# EAGLE board I2CbusTesterV1.0 (EAGLE 5.06)
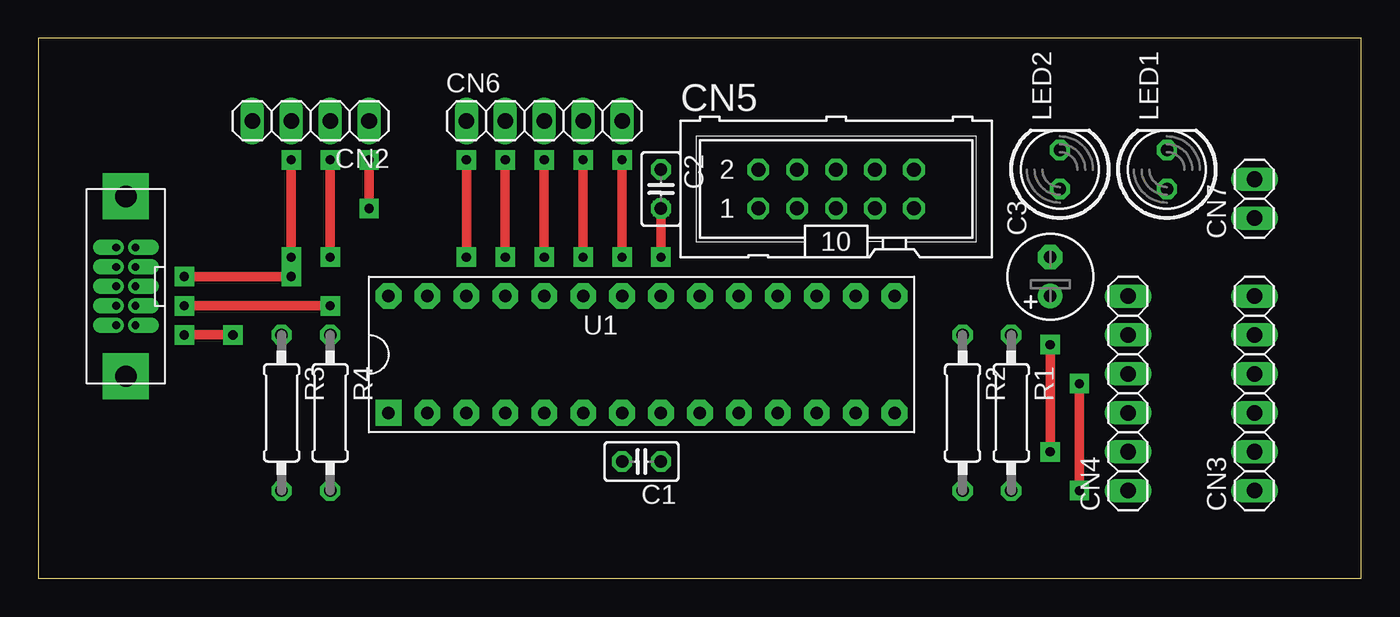
[diagram p0: board, top side]
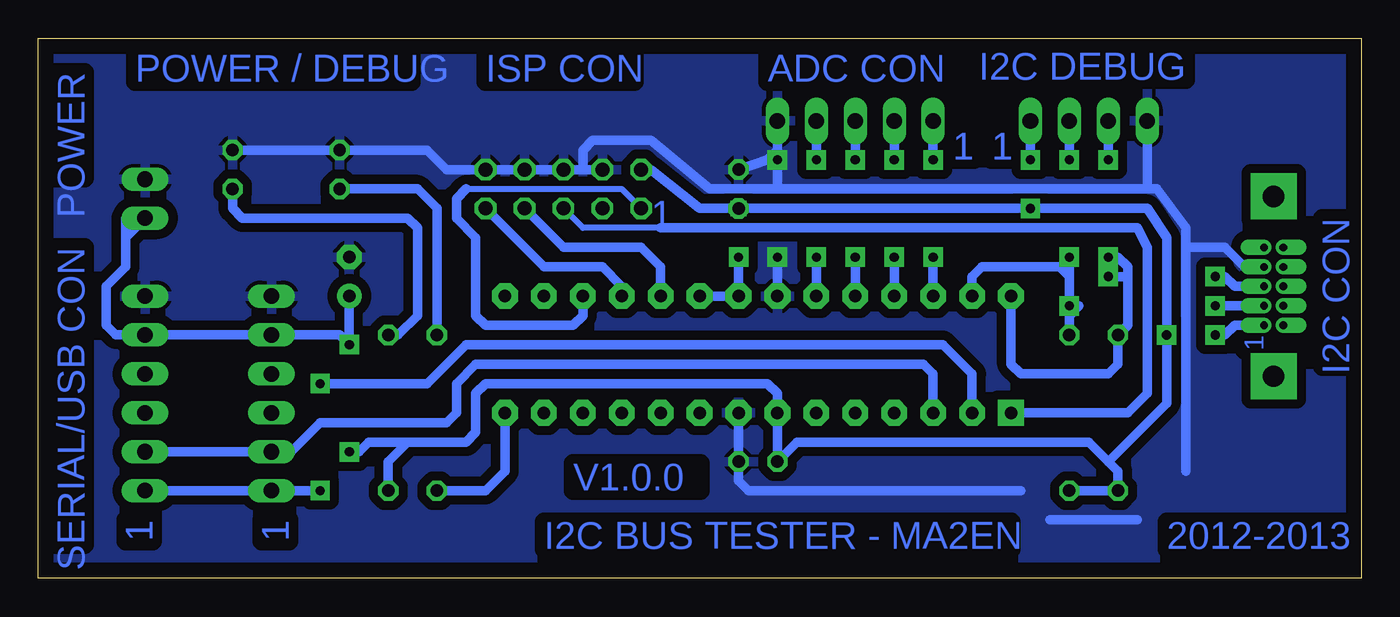
[diagram p1: board, bottom side, seen from below]

Size 86.34 x 35.23 mm. Coordinates in mm from the lower left corner, seen from the top.
Outline: 0,0 86.34,0 86.34,35.23 0,35.23 0,0
Copper layers (1*16): Top 0.035mm / dielectric 1.5mm / Bottom 0.035mm
Design rules "default": minimum track width 10mil, minimum drill 24mil, track to track 8mil, track to pad 8mil, pad to pad 8mil, via to via 8mil, smd to smd 8mil, copper to edge 40mil, drill to drill 8mil, minimum pad ring 10mil, minimum via ring 8mil, stop-mask expansion 4mil, vias tented up to drill 0mil, thermal gap 10mil

## Footprints (pad centres in the part's own frame; a part is rotated, then mirrored left to right if it is on the bottom)
C025-025X050 = drill 0.813 octagon: 1 -1.27,0; 2 1.27,0
E2,5-6 = drill 0.813 pad 1.6 round: + -1.27,0 | drill 0.813 pad 1.6 octagon: - 1.27,0
2X05-TH1.27MM-LC = drill 0.5 pad 1.016 offset: 1 -2.54,-0.635; 2 -2.54,0.635; 3 -1.27,-0.635; 4 -1.27,0.635; 5 0,-0.635; 6 0,0.635; 7 1.27,-0.635; 8 1.27,0.635; 9 2.54,-0.635; 10 2.54,0.635 | drill 1.4 pad 3 square: P$11 -5.867,0; P$12 5.867,0
1X04 = drill 1.016 long: 1 -3.81,0; 2 -1.27,0; 3 1.27,0; 4 3.81,0
1X06 = drill 1.016 long: 1 -6.35,0; 2 -3.81,0; 3 -1.27,0; 4 1.27,0; 5 3.81,0; 6 6.35,0
ML10 = drill 0.914 octagon: 1 -5.08,-1.27; 2 -5.08,1.27; 3 -2.54,-1.27; 4 -2.54,1.27; 5 0,-1.27; 6 0,1.27; 7 2.54,-1.27; 8 2.54,1.27; 9 5.08,-1.27; 10 5.08,1.27
1X05 = drill 1.016 long: 1 -5.08,0; 2 -2.54,0; 3 0,0; 4 2.54,0; 5 5.08,0
1X02 = drill 1.016 long: 1 -1.27,0; 2 1.27,0
LED5MM = drill 0.813 octagon: A -1.27,0; K 1.27,0
0207/10 = drill 0.813 octagon: 1 -5.08,0; 2 5.08,0
AT28DIP = drill 0.813 pad 1.676 square: 1 -16.51,-3.81 | drill 0.813 pad 1.676 octagon: 2 -13.97,-3.81; 3 -11.43,-3.81; 4 -8.89,-3.81; 5 -6.35,-3.81; 6 -3.81,-3.81; 7 -1.27,-3.81; 8 1.27,-3.81; 9 3.81,-3.81; 10 6.35,-3.81; 11 8.89,-3.81; 12 11.43,-3.81; 13 13.97,-3.81; 14 16.51,-3.81; 15 16.51,3.81; 16 13.97,3.81; 17 11.43,3.81; 18 8.89,3.81; 19 6.35,3.81; 20 3.81,3.81; 21 1.27,3.81; 22 -1.27,3.81; 23 -3.81,3.81; 24 -6.35,3.81; 25 -8.89,3.81; 26 -11.43,3.81; 27 -13.97,3.81; 28 -16.51,3.81

## Placement (x,y rotation side)
C1  100nF  [C025-025X050]  39.37,7.62 180 top
C2  100nF  [C025-025X050]  40.64,25.4 270 top
C3  22µF 16V  [E2,5-6]  66.04,19.69 90 top
CN1  I2C CON  [2X05-TH1.27MM-LC]  5.71,19.05 90 top
CN2  I2C DEBUG  [1X04]  17.78,29.84 180 top
CN3  SERIAL/USB CON  [1X06]  79.38,12.07 90 top
CN4  SERIAL/USB DEBUG  [1X06]  71.12,12.07 90 top
CN5  ISP CON  [ML10]  52.07,25.4 0 top
CN6  ADC CON  [1X05]  33.02,29.84 0 top
CN7  POWER CON  [1X02]  79.38,24.77 90 top
LED1  POWER  [LED5MM]  73.66,26.67 90 top
LED2  DEBUG  [LED5MM]  66.67,26.67 90 top
R1  2K  [0207/10]  63.5,10.8 270 top
R2  2K  [0207/10]  60.33,10.8 270 top
R3  4K7  [0207/10]  15.88,10.8 270 top
R4  4K7  [0207/10]  19.05,10.8 270 top
U1  [AT28DIP]  39.37,14.61 0 top

## Library data of the parts
C1-C3 R1-R4 = rcl
CN1 U1 = my_lib
CN2-CN4 CN6 CN7 = pinhead
CN5 = con-harting-ml
LED1 LED2 = led

## Nets
+3V3: C1.2 C2.2 C3.+ CN1.1 CN2.1 CN3.5 CN4.5 CN5.2 CN7.1 R1.2 R3.2 R4.2 U1.7 U1.20 U1.21
ADC0: CN6.4 U1.23
ADC1: CN6.3 U1.24
ADC2: CN6.2 U1.25
ADC3: CN6.1 U1.26
GND: C1.1 C2.1 C3.- CN1.7 CN2.4 CN3.6 CN4.6 CN5.4 CN5.6 CN5.8 CN5.10 CN6.5 CN7.2 LED1.K LED2.K U1.8 U1.22
MISO: CN5.9 U1.18
MOSI: CN5.1 U1.17
N$2: CN5.3
N$3: LED1.A R1.1
N$5: LED2.A R2.1
N$6: R2.2 U1.14
RST: CN5.5 U1.1
RX: CN3.1 CN4.1 U1.2
SCK: CN5.7 U1.19
SCL: CN1.5 CN2.3 R3.1 U1.28
SDA: CN1.3 CN2.2 R4.1 U1.27
TX: CN3.2 CN4.2 U1.3

## Tracks (layer width: path | path; a pad name or v marks a point on that pad's centre or on a via)
+3V3  (via drill 0.6 pad 1.02, 0.6 pad 1.27)
  Top 0.61: C2.2 v40.64,20.96 | v21.59,24.13 v21.59,27.3 | v9.52,15.88 v12.7,15.88 | v66.04,8.26 v66.04,15.24
  Bottom 0.61: R4.2 R3.2 15.88,6.98 16.51,7.62 | 16.51,7.62 12.7,11.43 v12.7,15.88 12.7,22.23 13.97,24.13 v21.59,24.13 C2.2 43.18,24.13 46.36,26.67 CN5.2 | v40.64,20.96 U1.21 U1.20 | v21.59,27.3 CN2.1 | CN1.1 8.25,16.51 8.89,15.88 v9.52,15.88 | 62.23,8.89 58.42,8.89 57.78,9.53 57.78,12.07 57.15,12.7 38.73,12.7 38.1,12.07 U1.7 C1.2 36.83,8.89 17.78,8.89 16.51,7.62 | R1.2 63.5,7.62 62.23,8.89 | 62.23,8.89 64.77,8.89 65.41,8.26 v66.04,8.26 | 80.64,21.59 80.64,20.32 81.91,19.05 81.91,16.51 81.28,15.88 CN3.5 CN4.5 66.67,15.88 v66.04,15.24 C3.+ | 80.64,21.59 80.64,22.23 CN7.1 | 80.64,21.59 80.64,23.5
  other vias: 40.64,24.13
ADC0  (via drill 0.6 pad 1.27)
  Top 0.61: v35.56,20.96 v35.56,27.3
  Bottom 0.61: U1.23 v35.56,20.96 | v35.56,27.3 CN6.4
ADC1  (via drill 0.6 pad 1.27)
  Top 0.61: v33.02,20.96 v33.02,27.3
  Bottom 0.61: U1.24 v33.02,20.96 | v33.02,27.3 CN6.3
ADC2  (via drill 0.6 pad 1.27)
  Top 0.61: v30.48,20.96 v30.48,27.3
  Bottom 0.61: v30.48,27.3 CN6.2 | U1.25 v30.48,20.96
ADC3  (via drill 0.6 pad 1.27)
  Top 0.61: v27.94,20.96 v27.94,27.3
  Bottom 0.61: U1.26 v27.94,20.96 | v27.94,27.3 CN6.1
GND  (via drill 0.6 pad 1.27)
  Top 0.61: v38.1,27.3 v38.1,20.96
  Bottom 0.61: 50.8,26.67 CN5.4 | 50.8,26.67 CN5.6 CN5.8 CN5.10 59.69,26.67 60.96,27.94 LED2.K LED1.K | U1.8 C1.1 40.64,6.35 40,5.72 22.22,5.72 | 14.6,3.81 20.32,3.81 | 11.43,6.98 11.43,21.59 | 13.97,25.4 38.1,25.4 | 38.1,25.4 v38.1,27.3 38.1,27.94 | v38.1,20.96 U1.22 | 38.1,27.94 CN6.5 | 38.1,25.4 42.55,25.4 46.36,28.58 50.16,28.58 50.8,27.94 50.8,26.67 | 13.97,25.4 CN2.4 | CN1.7 7.62,20.32 8.89,21.59 11.43,21.59 | 13.97,25.4 13.34,25.4 11.43,22.86 11.43,21.59 | C2.1 38.73,27.3 38.1,27.94
  pour Bottom (isolate 0.61): -0.64,34.92 -0.64,-1.9 88.27,-1.9 88.27,-1.27 88.27,34.92
MISO
  Bottom 0.61: U1.18 48.26,19.05 49.53,20.32 53.34,20.32 CN5.9
MOSI
  Bottom 0.406: 58.42,25.4 48.26,25.4 CN5.1
  Bottom 0.61: U1.17 50.8,17.15 51.44,16.51 57.15,16.51 57.78,17.15 57.78,22.23 59.05,23.5 59.05,24.77 58.42,25.4
N$3
  Bottom 0.61: R1.1 62.86,15.88 61.59,17.15 61.59,22.86 62.23,23.5 73.02,23.5 73.66,24.13 LED1.A
N$5
  Bottom 0.61: R2.1 60.33,24.13 61.59,25.4 LED2.A
N$6
  Bottom 0.61: R2.2 57.15,5.72 55.88,6.98 U1.14
RST
  Bottom 0.406: 45.72,22.86 50.8,22.86 CN5.5
  Bottom 0.61: U1.1 15.24,10.8 13.97,12.07 13.97,21.59 14.6,22.86 45.72,22.86
RX  (via drill 0.6 pad 1.27)
  Top 0.61: v67.94,12.7 v67.94,5.72
  Bottom 0.61: U1.2 25.4,13.34 27.3,15.24 58.42,15.24 60.96,12.7 v67.94,12.7 | CN3.1 CN4.1 v67.94,5.72
SCK
  Bottom 0.61: U1.19 45.72,20.32 46.99,21.59 52.07,21.59 CN5.7
SCL  (via drill 0.6 pad 1.27)
  Top 0.61: v16.51,20.96 v16.51,27.3 | v9.52,19.69 v16.51,19.69
  Bottom 0.61: v16.51,27.3 CN2.3 | U1.28 22.86,13.97 22.22,13.34 16.51,13.34 15.88,13.97 R3.1 15.24,16.51 15.24,19.69 | CN1.5 8.25,19.05 8.89,19.69 v9.52,19.69 | v16.51,19.69 15.24,19.69 | v16.51,20.96 15.88,20.96 15.24,20.32 15.24,19.69
SDA  (via drill 0.6 pad 1.27)
  Top 0.61: v19.05,20.96 v19.05,27.3 | v9.52,17.78 v19.05,17.78
  Bottom 0.61: 19.05,17.15 R4.1 | 19.05,17.15 19.05,19.69 | 19.05,19.69 v19.05,20.96 | v19.05,27.3 CN2.2 | U1.27 25.4,19.69 24.77,20.32 19.68,20.32 19.05,19.69 | CN1.3 v9.52,17.78 | v19.05,17.78 18.41,17.78 19.05,17.15
TX
  Bottom 0.61: U1.3 27.94,13.34 28.58,13.97 57.78,13.97 59.05,12.7 59.05,10.8 59.69,10.16 67.94,10.16 69.85,8.26 CN4.2 CN3.2

## Text on the board
Bottom: I2C DEBUG | POWER | ADC CON | ISP CON | POWER / DEBUG | 1 | 1 | I2C CON | 1 | SERIAL/USB CON | V1.0.0 | 1 | 1 | 2012-2013 | I2C BUS TESTER - MA2EN